# EAGLE board ProxiBoard(rev2) (EAGLE 6.5.0)
DESIGNER: AirThings Inc; REV: 2.0; SENSOR: Proximity sensor
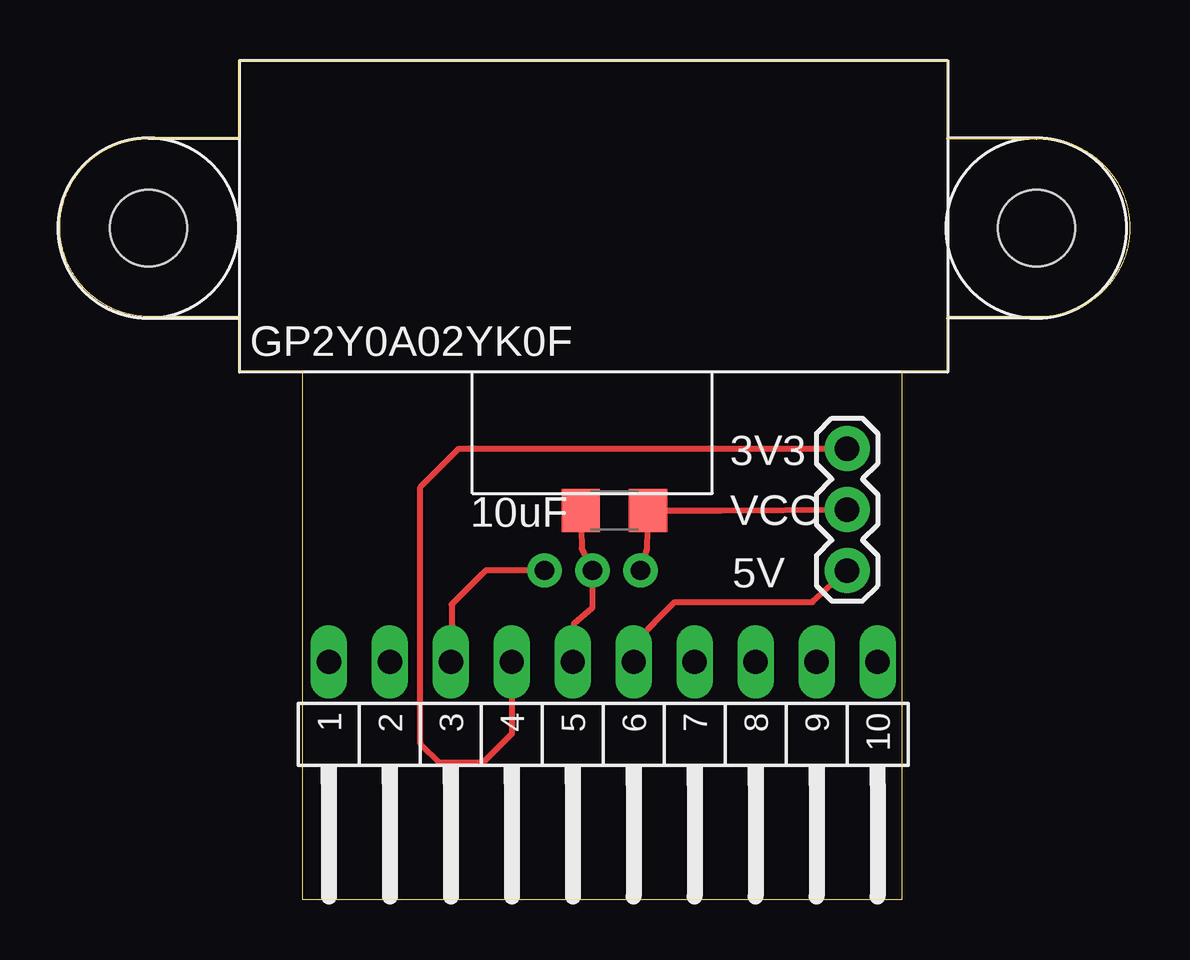
[diagram p0: board, top side]
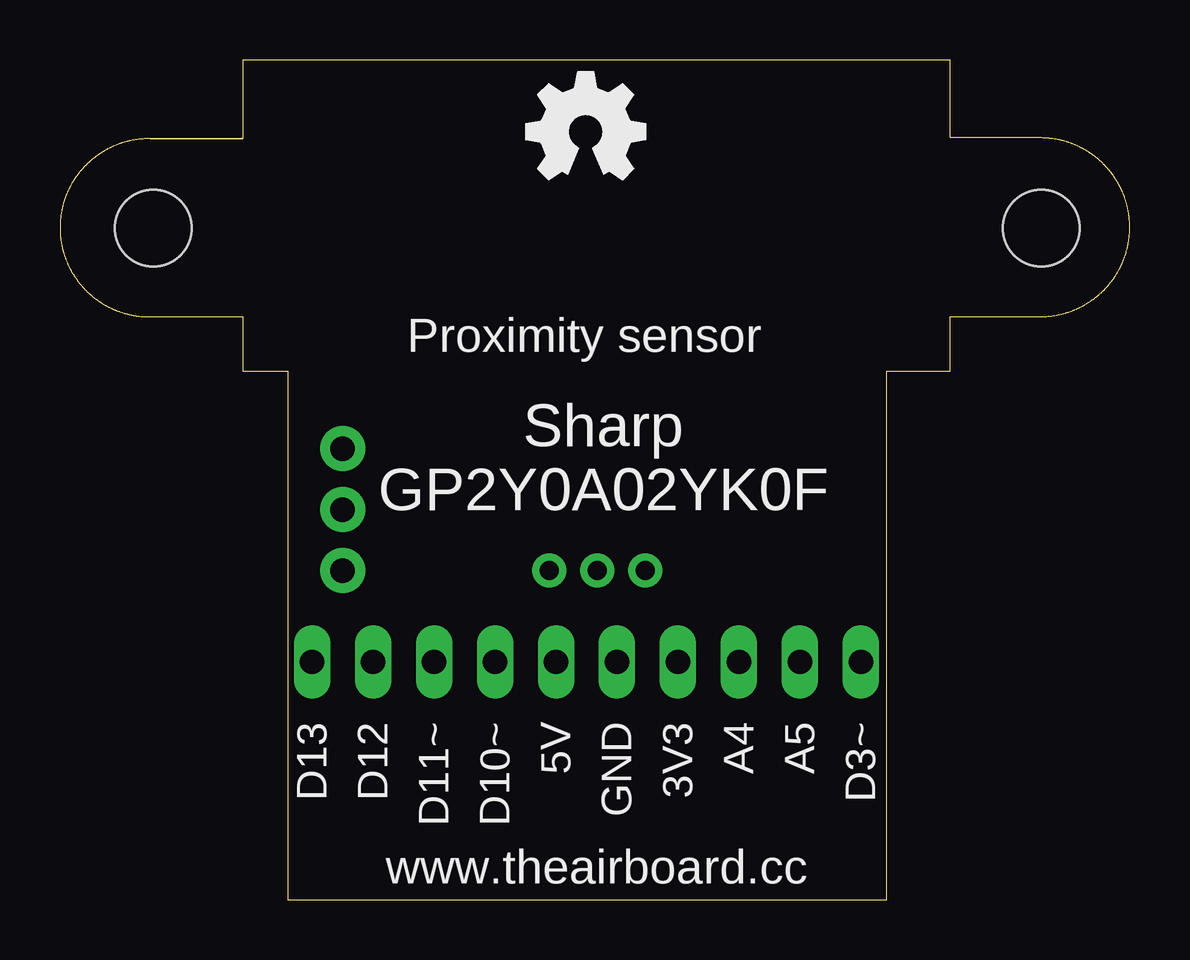
[diagram p1: board, bottom side, seen from below]

Size 44.57 x 35 mm. Coordinates in mm from the lower left corner, seen from the top.
Outline: 40.82,31.72 36.96,31.72
Outline: 36.96,31.72 36.96,31.72
Outline: 36.96,31.72 40.84,31.72 40.87,31.72 40.91,31.72 40.94,31.72 40.97,31.71 41,31.71 41.04,31.71 41.07,31.71 41.1,31.71 41.12,31.71 41.15,31.7 41.17,31.7 41.19,31.7 41.21,31.7 41.23,31.7 41.26,31.69 41.29,31.69 41.33,31.69 41.37,31.68 41.4,31.68 41.44,31.67 41.47,31.66 41.51,31.66 41.56,31.65 41.6,31.64 41.63,31.63 41.66,31.63 41.69,31.62 41.71,31.61 41.73,31.61 41.75,31.6 41.78,31.6 41.8,31.59 41.82,31.59 41.86,31.58 41.9,31.56 41.94,31.55 41.97,31.54 42,31.53 42.03,31.52 42.06,31.51 42.1,31.5 42.13,31.49 42.16,31.48 42.2,31.46 42.23,31.45 42.27,31.44 42.3,31.42 42.33,31.41 42.35,31.4 42.38,31.39 42.4,31.38 42.43,31.36 42.46,31.35 42.49,31.34 42.51,31.33 42.53,31.31 42.55,31.3 42.57,31.29 42.59,31.28 42.61,31.27 42.64,31.26 42.67,31.24 42.7,31.22 42.72,31.21 42.74,31.2 42.76,31.19 42.77,31.18 42.79,31.17 42.81,31.16 42.83,31.14 42.85,31.13 42.87,31.12 42.9,31.1 42.92,31.09 42.95,31.07 42.96,31.06 42.98,31.04 43,31.03 43.03,31.01 43.05,30.99 43.08,30.97 43.1,30.96 43.11,30.95 43.13,30.94 43.15,30.92 43.17,30.9 43.2,30.88 43.22,30.86 43.25,30.84 43.27,30.82 43.29,30.8 43.31,30.79 43.33,30.77 43.34,30.76 43.35,30.75 43.37,30.74 43.38,30.72 43.4,30.71 43.42,30.69 43.43,30.67 43.45,30.66 43.47,30.64 43.49,30.62 43.5,30.6 43.52,30.59 43.54,30.57 43.56,30.55 43.58,30.53 43.6,30.51 43.61,30.49 43.63,30.47 43.64,30.46 43.66,30.44 43.67,30.43 43.68,30.41 43.7,30.39 43.71,30.38 43.73,30.36 43.75,30.33 43.76,30.31 43.78,30.29 43.8,30.26 43.82,30.24 43.84,30.22 43.85,30.2 43.86,30.18 43.88,30.16 43.9,30.13 43.92,30.11 43.93,30.09 43.94,30.07 43.96,30.05 43.97,30.03 43.98,30.01 43.99,29.99 44.01,29.97 44.02,29.94 44.04,29.92 44.05,29.9 44.06,29.88 44.08,29.86 44.1,29.82 44.12,29.79 44.13,29.75 44.15,29.73 44.16,29.7 44.17,29.68 44.19,29.64 44.21,29.61 44.23,29.57 44.24,29.54 44.25,29.51 44.26,29.48 44.28,29.46 44.29,29.44 44.3,29.41 44.31,29.39 44.32,29.36 44.33,29.34 44.34,29.31 44.35,29.28 44.36,29.25 44.37,29.22 44.38,29.19 44.39,29.15 44.4,29.14 44.4,29.12 44.41,29.1 44.42,29.07 44.42,29.05 44.43,29.03 44.44,28.99 44.45,28.96 44.46,28.92 44.47,28.89 44.47,28.85 44.48,28.82 44.49,28.79 44.5,28.76 44.5,28.73 44.51,28.69 44.51,28.66 44.52,28.63 44.53,28.59 44.53,28.56 44.54,28.52 44.54,28.5 44.54,28.47 44.55,28.45 44.55,28.43 44.55,28.4 44.55,28.37 44.56,28.35 44.56,28.32 44.56,28.29 44.56,28.26 44.57,28.23 44.57,28.2 44.57,28.18 44.57,28.16 44.57,28.13 44.57,28.09 44.57,28.05 44.57,27.98 44.57,27.96 44.57,27.94 44.57,27.89 44.57,27.85 44.57,27.8 44.57,27.75 44.56,27.7 44.56,27.66 44.55,27.62 44.55,27.59 44.55,27.55 44.54,27.52 44.54,27.5 44.54,27.47 44.53,27.44 44.53,27.4 44.52,27.37 44.51,27.34 44.51,27.31 44.5,27.28 44.5,27.26 44.49,27.23 44.49,27.21 44.48,27.18 44.47,27.15 44.46,27.11 44.46,27.1 44.46,27.08 44.45,27.06 44.44,27.03 44.43,27 44.43,26.97 44.41,26.93 44.4,26.89 44.39,26.85 44.38,26.81 44.37,26.78 44.35,26.75 44.34,26.72 44.33,26.7 44.32,26.67 44.31,26.63 44.29,26.59 44.28,26.56 44.27,26.53 44.25,26.5 44.24,26.47 44.23,26.44 44.21,26.41 44.2,26.39 44.18,26.35 44.16,26.31 44.15,26.28 44.14,26.26 44.12,26.24 44.11,26.22 44.1,26.19 44.08,26.15 44.06,26.12 44.04,26.09 44.02,26.07 44.01,26.04 44,26.02 43.98,26 43.97,25.98 43.95,25.95 43.93,25.92 43.9,25.88 43.88,25.86 43.86,25.83 43.84,25.8 43.83,25.79 43.82,25.77 43.81,25.75 43.79,25.73 43.77,25.71 43.75,25.68 43.73,25.66 43.71,25.63 43.69,25.61 43.66,25.58 43.64,25.55 43.62,25.53 43.59,25.5 43.56,25.47 43.53,25.44 43.51,25.41 43.48,25.38 43.45,25.35 43.43,25.33 43.4,25.31 43.38,25.29 43.37,25.27 43.35,25.26 43.34,25.25 43.32,25.23 43.3,25.21 43.28,25.2 43.25,25.17 43.22,25.15 43.19,25.12 43.16,25.1 43.14,25.08 43.11,25.06 43.1,25.05 43.08,25.04 43.07,25.03 43.04,25.01 43.02,24.99 42.99,24.97 42.96,24.95 42.94,24.94 42.92,24.92 42.9,24.91 42.88,24.89 42.86,24.88 42.84,24.87 42.82,24.86 42.81,24.85 42.77,24.83 42.74,24.81 42.71,24.79 42.7,24.79 42.69,24.78 42.68,24.78 42.67,24.77 42.65,24.76 42.63,24.75 42.62,24.74 42.6,24.73 42.58,24.72 42.56,24.71 42.53,24.69 42.5,24.68 42.47,24.67 42.44,24.65 42.41,24.64 42.39,24.63 42.37,24.62 42.35,24.61 42.33,24.6 42.32,24.6 42.31,24.59 42.3,24.59 42.29,24.58 42.27,24.58 42.26,24.57 42.24,24.56 42.22,24.56 42.2,24.55 42.18,24.54 42.16,24.53 42.13,24.52 42.1,24.51 42.08,24.5 42.05,24.49 42.01,24.48 41.98,24.47 41.95,24.46 41.92,24.45 41.89,24.44 41.87,24.44 41.85,24.43 41.82,24.42 41.8,24.42 41.78,24.41 41.76,24.41 41.73,24.4 41.71,24.39 41.68,24.39 41.67,24.38 41.65,24.38 41.63,24.38 41.6,24.37 41.58,24.37 41.55,24.36 41.52,24.35 41.48,24.35 41.44,24.34 41.42,24.34 41.39,24.33 41.36,24.33 41.34,24.33 41.32,24.32 41.3,24.32 41.27,24.32 41.24,24.32 41.22,24.31 41.19,24.31 41.16,24.31 41.14,24.31 41.12,24.3 41.1,24.3 41.08,24.3 41.05,24.3 41.03,24.3 41,24.3 40.95,24.29 40.89,24.29 40.84,24.29 40.83,24.29 36.97,24.29 36.97,22.03 35.08,22.03 35.08,0 10.12,0 10.12,22.03 7.48,22.03 7.48,24.3 3.75,24.3 3.74,24.3 3.67,24.3 3.61,24.3 3.55,24.3 3.52,24.31 3.49,24.31 3.46,24.31 3.41,24.31 3.37,24.32 3.32,24.32 3.28,24.33 3.24,24.33 3.2,24.34 3.17,24.34 3.15,24.35 3.12,24.35 3.07,24.36 3.03,24.37 2.98,24.38 2.96,24.38 2.94,24.39 2.91,24.39 2.89,24.4 2.86,24.4 2.83,24.41 2.79,24.42 2.75,24.43 2.72,24.44 2.69,24.45 2.66,24.46 2.64,24.46 2.62,24.47 2.6,24.48 2.58,24.48 2.56,24.49 2.53,24.5 2.51,24.5 2.48,24.52 2.44,24.53 2.41,24.54 2.38,24.55 2.35,24.57 2.32,24.58 2.28,24.59 2.25,24.61 2.22,24.62 2.19,24.63 2.16,24.65 2.13,24.66 2.11,24.67 2.09,24.68 2.06,24.69 2.03,24.71 2,24.73 1.97,24.74 1.94,24.76 1.92,24.77 1.9,24.78 1.87,24.8 1.83,24.82 1.8,24.84 1.77,24.86 1.73,24.88 1.7,24.9 1.67,24.92 1.63,24.94 1.6,24.97 1.58,24.98 1.55,25 1.53,25.02 1.51,25.03 1.48,25.05 1.46,25.07 1.44,25.09 1.42,25.1 1.39,25.12 1.38,25.14 1.36,25.15 1.34,25.16 1.33,25.18 1.31,25.19 1.3,25.2 1.27,25.23 1.24,25.25 1.22,25.27 1.2,25.29 1.18,25.31 1.16,25.33 1.14,25.34 1.12,25.36 1.1,25.38 1.09,25.39 1.08,25.4 1.07,25.42 1.05,25.43 1.03,25.45 1.01,25.47 0.99,25.5 0.97,25.52 0.95,25.54 0.94,25.55 0.93,25.57 0.91,25.59 0.9,25.6 0.88,25.62 0.87,25.64 0.85,25.66 0.83,25.69 0.81,25.71 0.78,25.74 0.76,25.77 0.74,25.81 0.72,25.82 0.71,25.84 0.69,25.86 0.67,25.89 0.66,25.92 0.64,25.94 0.62,25.98 0.59,26.01 0.57,26.05 0.56,26.07 0.55,26.08 0.53,26.1 0.52,26.12 0.51,26.14 0.5,26.16 0.48,26.2 0.46,26.23 0.44,26.27 0.42,26.3 0.41,26.33 0.39,26.36 0.38,26.39 0.37,26.41 0.36,26.43 0.35,26.45 0.34,26.47 0.33,26.49 0.32,26.52 0.31,26.55 0.29,26.58 0.28,26.61 0.26,26.65 0.25,26.68 0.24,26.71 0.23,26.73 0.22,26.76 0.21,26.78 0.2,26.81 0.19,26.84 0.19,26.86 0.18,26.89 0.17,26.92 0.16,26.95 0.15,26.99 0.14,27.03 0.13,27.07 0.11,27.11 0.1,27.15 0.1,27.17 0.09,27.2 0.09,27.23 0.08,27.25 0.08,27.27 0.07,27.3 0.07,27.33 0.06,27.36 0.05,27.4 0.05,27.44 0.04,27.49 0.03,27.54 0.03,27.57 0.02,27.6 0.02,27.63 0.02,27.66 0.02,27.69 0.01,27.72 0.01,27.75 0.01,27.78 0.01,27.81 0.01,27.84 0,27.86 0,27.89 0,27.92 0,27.95 0,27.98 0,28 0,28.01 0,28.03 0,28.05 0,28.07 0,28.09 0,28.13 0,28.18 0.01,28.22 0.01,28.25 0.01,28.28 0.01,28.32 0.02,28.36 0.02,28.41 0.03,28.46 0.03,28.49 0.03,28.51 0.04,28.54 0.04,28.58 0.05,28.63 0.06,28.67 0.06,28.7 0.07,28.72 0.07,28.75 0.08,28.78 0.08,28.82 0.09,28.85 0.1,28.89 0.11,28.92 0.12,28.96 0.13,28.99 0.13,29.02 0.14,29.05 0.15,29.08 0.16,29.12 0.17,29.15 0.19,29.19 0.2,29.23 0.22,29.28 0.23,29.31 0.24,29.34 0.25,29.37 0.27,29.41 0.28,29.44 0.3,29.48 0.31,29.5 0.32,29.53 0.33,29.55 0.34,29.58 0.35,29.6 0.36,29.62 0.37,29.65 0.38,29.67 0.39,29.69 0.4,29.71 0.41,29.72 0.42,29.74 0.43,29.76 0.44,29.79 0.46,29.81 0.47,29.83 0.48,29.86 0.5,29.88 0.52,29.92 0.54,29.95 0.56,29.99 0.58,30.02 0.6,30.05 0.62,30.07 0.63,30.1 0.65,30.12 0.66,30.15 0.68,30.17 0.69,30.19 0.71,30.21 0.72,30.23 0.73,30.24 0.75,30.26 0.76,30.28 0.77,30.29 0.78,30.3 0.8,30.32 0.81,30.34 0.83,30.36 0.84,30.38 0.86,30.4 0.87,30.42 0.89,30.44 0.91,30.46 0.93,30.49 0.95,30.51 0.98,30.54 1,30.56 1.01,30.57 1.03,30.59 1.04,30.61 1.05,30.62 1.07,30.63 1.08,30.64 1.1,30.67 1.12,30.69 1.15,30.71 1.17,30.74 1.2,30.76 1.22,30.78 1.24,30.8 1.25,30.81 1.27,30.82 1.29,30.84 1.31,30.86 1.34,30.88 1.36,30.9 1.39,30.92 1.42,30.95 1.44,30.97 1.47,30.99 1.49,31.01 1.51,31.02 1.53,31.03 1.54,31.04 1.56,31.06 1.58,31.07 1.6,31.09 1.62,31.09 1.63,31.1 1.64,31.11 1.66,31.12 1.67,31.13 1.69,31.14 1.71,31.16 1.74,31.17 1.76,31.19 1.79,31.21 1.82,31.22 1.84,31.24 1.87,31.25 1.9,31.27 1.92,31.28 1.94,31.3 1.97,31.31 1.99,31.32 2.02,31.33 2.05,31.35 2.08,31.36 2.11,31.38 2.14,31.39 2.16,31.41 2.19,31.42 2.22,31.43 2.24,31.44 2.26,31.45 2.28,31.46 2.3,31.46 2.32,31.48 2.35,31.49 2.38,31.5 2.4,31.51 2.42,31.51 2.44,31.52 2.48,31.53 2.51,31.55 2.55,31.56 2.57,31.57 2.59,31.57 2.61,31.58 2.63,31.59 2.66,31.59 2.68,31.6 2.71,31.61 2.74,31.62 2.77,31.63 2.79,31.63 2.82,31.64 2.84,31.64 2.86,31.65 2.88,31.65 2.9,31.66 2.92,31.66 2.94,31.67 2.97,31.67 2.99,31.68 3.01,31.68 3.03,31.68 3.05,31.69 3.08,31.69 3.11,31.7 3.15,31.71 3.19,31.71 3.23,31.72 3.25,31.72 3.28,31.72 3.3,31.73 3.33,31.73 3.35,31.73 3.38,31.73 3.41,31.74 3.44,31.74 3.47,31.74 3.5,31.74 3.53,31.75 3.56,31.75 3.62,31.75 3.68,31.75 7.47,31.75 7.47,35 36.96,35 36.96,31.72
Copper layers (1*16): Top 0.035mm / dielectric 1.5mm / Bottom 0.035mm
Design rules "default": minimum track width 10mil, minimum drill 24mil, track to track 8mil, track to pad 8mil, pad to pad 8mil, via to via 8mil, smd to smd 8mil, copper to edge 40mil, drill to drill 8mil, minimum pad ring 10mil, minimum via ring 8mil, stop-mask expansion 4mil, vias tented up to drill 0mil, thermal gap 10mil

## Footprints (pad centres in the part's own frame; a part is rotated, then mirrored left to right if it is on the bottom)
1206 = smd 1.6 x 1.8: 1 -1.4,0; 2 1.4,0
SIL10-2.54MM = drill 1.016 long: 1 11.43,0; 2 8.89,0; 3 6.35,0; 4 3.81,0; 5 1.27,0; 6 -1.27,0; 7 -3.81,0; 8 -6.35,0; 9 -8.89,0; 10 -11.43,0
1X03 = drill 1.016 pad 1.88: 1 0,0; 2 2.54,0; 3 5.08,0
GP2Y0A02YK0F = drill 0.8 pad 1.422: 1 16.5,-14.27; 2 18.5,-14.27; 3 20.5,-14.27 | hole 3.2: 0,0; 37,0

## Placement (x,y rotation side)
C1  10uF  [1206]  23.1,16.22 180 top
FRAME1  SCH_FRAME  [BOARD_FRAME]  -54.83,-62.48 0 top  (outside the outline)
JP1  SIL  [SIL10-2.54MM]  22.64,9.91 180 top
JP2  [1X03]  32.8,13.72 90 top
U1  GP2Y0A02YK0F  [GP2Y0A02YK0F]  3.69,27.99 0 top

## Library data of the parts
C1 = SparkFun-Capacitors; PROD_ID: CAP-10057
FRAME1 = theairboard
JP1 = TheAirBoard_breakouts; DATASHEET: www.farnell.com/datasheets/8281.pdf; DESCRIPTION: Thru-hole, right angle, male, 1 row, 10-way, 2.54mm; FARNELL: 1097958; MANUFACTURER: FCI; NEWARK: 93K5133; PART_NUMBER: 77315-818-36LF
JP2 = SparkFun-Connectors
U1 = TheAirBoard_breakouts; DATASHEET: www.sharpsma.com/webfm_send/1487; DESCRIPTION: Measuring Distance: 20 to 150 cm. Analog output type; FARNELL: 9707891; MANUFACTURER: SHARP; NEWARK: 63K9295; PART_NUMBER: GP2Y0A02YK0F

## Nets
3V3: JP1.4 JP2.3
5V: JP1.6 JP2.1
A4: JP1.3 U1.1
N$1: C1.1 JP2.2 U1.3
N$2: C1.2 JP1.5 U1.2

## Tracks (layer width: path | path; a pad name or v marks a point on that pad's centre or on a via)
3V3
  Top 0.254: JP1.4 18.83,6.91 17.62,5.7 15.82,5.7 15.02,6.5 15.02,17.2 16.62,18.8 JP2.3
5V
  Top 0.254: JP1.6 23.91,10.69 25.62,12.4 31.35,12.4 JP2.1
A4
  Top 0.254: U1.1 17.74,13.72 16.32,12.3 16.32,9.94 JP1.3
N$1
  Top 0.254: U1.3 24.46,14.61 C1.1 27.57,16.22 JP2.2
N$2
  Top 0.254: C1.2 21.74,14.65 U1.2 22.19,12.17 21.42,11.5 21.42,9.96 JP1.5

## Text on the board
tNames: 3V3 | VCC | 5V
bNames: Sharp / GP2Y0A02YK0F | D3~ | A5 | A4 | 3V3 | GND | 5V | D10~ | D11~ | D12 | D13 | www.theairboard.cc